# EAGLE board blinkm_battir2 (EAGLE 5.07)
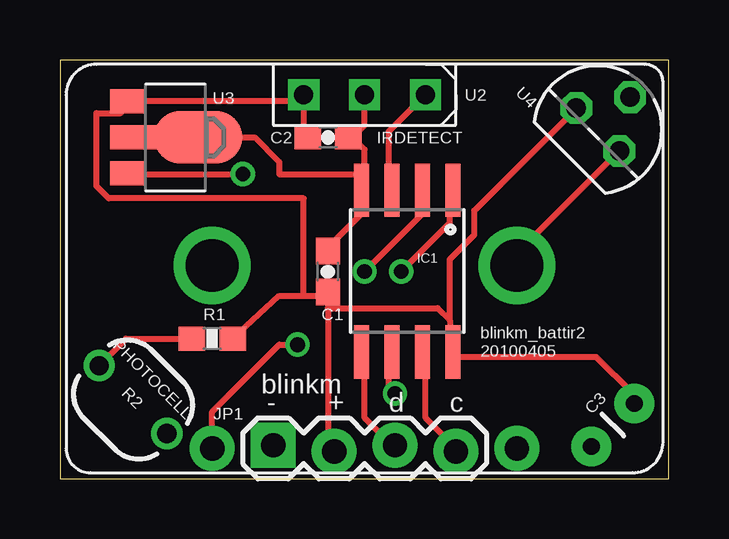
[diagram p0: board, top side]
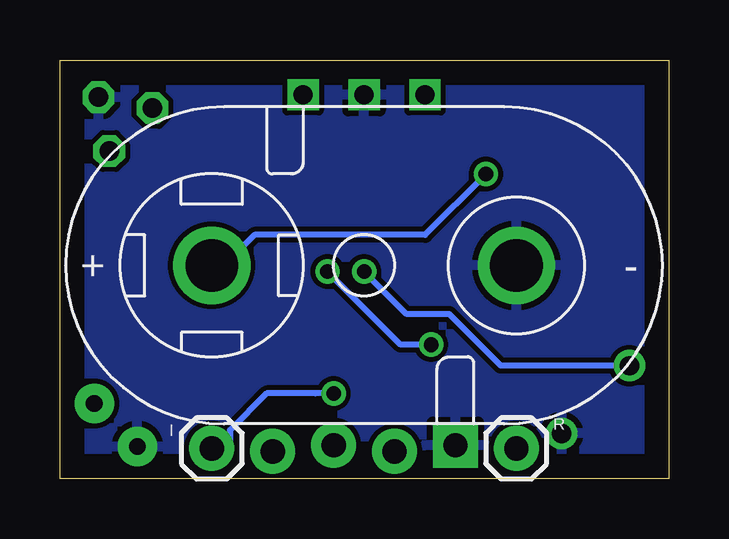
[diagram p1: board, bottom side, seen from below]

Size 25.38 x 17.45 mm. Coordinates in mm from the lower left corner, seen from the top.
Outline: 0,0 25.38,0 25.38,17.45 0,17.45 0,0
Copper layers (1*16): Top 0.035mm / dielectric 1.5mm / Bottom 0.035mm
Design rules "default *": minimum track width 10mil, minimum drill 24mil, track to track 8mil, track to pad 8mil, pad to pad 8mil, via to via 8mil, smd to smd 8mil, copper to edge 40mil, drill to drill 8mil, minimum pad ring 10mil, minimum via ring 8mil, stop-mask expansion 4mil, vias tented up to drill 25mil, thermal gap 10mil

## Footprints (pad centres in the part's own frame; a part is rotated, then mirrored left to right if it is on the bottom)
KEYSTONE_968_9V_VERT = drill 2.2 round: + 6.35,0; - -6.35,0
0603-CAP = smd 1.1 x 1: 1 -0.85,0; 2 0.85,0
CAP-PTH-SMALL = drill 0.7 pad 1.651 round: 1 0,0; 2 2.54,0
1X01 = drill 1.016 pad 1.88 round: 1 0,0
SO08-EIAJ = smd 0.61 x 2.21: 1 -1.905,-3.378; 2 -0.635,-3.378; 3 0.635,-3.378; 4 1.905,-3.378; 5 1.905,3.353; 6 0.635,3.353; 7 -0.635,3.353; 8 -1.905,3.353
1X04_LOCK = drill 1.016 pad 1.88 square: 1 0,0.127 | drill 1.016 pad 1.88 round: 2 2.54,-0.127; 3 5.08,0.127; 4 7.62,-0.127
0603-RES = smd 1.1 x 1: 1 -0.85,0; 2 0.85,0
PHOTOCELL = drill 0.8 round: 1 -2,0; 2 2,0
3PIN-2.54MM = drill 0.8 square: 1 -2.54,0; 2 0,0; 3 2.54,0
SOT89 = smd 1 x 1.5: 1 -1.499,-1.981; 3 1.499,-1.981 | smd 1 x 2: 2 0,-1.727 | smd 2.2 x 3.7: 2@1 0,0.94
TO92 = drill 0.813 octagon: 1 -1.27,0; 2 0,1.905; 3 1.27,0

## Placement (x,y rotation side)
B1  BATTERY_9V  [KEYSTONE_968_9V_VERT]  12.7,8.89 180 bottom
C1  100n  [0603-CAP]  11.18,8.64 90 top
C2  100n  [0603-CAP]  11.18,14.22 0 top
C3  [CAP-PTH-SMALL]  23.95,3.14 225 top
I  M01PTH  [1X01]  19.05,1.27 0 bottom
IC1  ATTINY45SOIC  [SO08-EIAJ]  14.48,8.64 180 top
JP1  blinkm  [1X04_LOCK]  8.89,1.27 0 top
R  M01PTH  [1X01]  6.35,1.27 0 bottom
R1  [0603-RES]  6.35,5.84 0 top
R2  PHOTOCELLPTH  [PHOTOCELL]  3.05,3.3 135 top
U2  IRDETECTOR  [3PIN-2.54MM]  12.7,16 180 top
U3  78L05F  [SOT89]  4.83,14.22 270 top
U4  7805L  [TO92]  22.43,14.55 315 top

## Library data of the parts
B1 IC1 U2 = todstuff
C1-C3 I JP1 R R1 R2 = SparkFun-20091103
U3 U4 = linear

## Nets
9V: B1.+ U3.3 U4.3
GND: B1.- C1.2 C2.2 C3.2 IC1.4 JP1.1 R2.1 U2.2 U3.2 U3.2@1 U4.2
IRDETECT: IC1.3 U2.1
MISO: I.1 IC1.6
PB3: IC1.2 R1.1 R2.2
RESET: IC1.1 R.1
SCL: IC1.7 JP1.4
SDA: IC1.5 JP1.3
VCC: C1.1 C2.1 C3.1 IC1.8 JP1.2 R1.2 U2.3 U3.1 U4.1

## Tracks (layer width: path | path; a pad name or v marks a point on that pad's centre or on a via)
9V  (via drill 0.61)
  Top 0.254: v7.62,12.7 3.05,12.7 U3.3 | U4.3 22.86,13.21 19.3,9.65 19.3,9.14 B1.+
  Bottom 0.254: v7.62,12.7 10.16,10.16 17.27,10.16 18.29,9.14 18.8,9.14 B1.+
GND
  Top 0.254: 12.19,14.22 12.7,14.73 12.7,15.75 U2.2 | 12.19,14.22 C2.2 12.19,14.22 | C1.2 11.18,9.65 12.7,11.18 12.7,11.68 IC1.4 | 12.19,14.22 12.7,13.72 12.7,12.7 | 12.7,12.7 12.7,12.19 IC1.4 | U3.2 3.56,14.22 5.59,14.22 U3.2@1 6.1,14.22 8.13,14.22 9.14,13.21 9.14,12.7 12.7,12.7 | 12.7,12.7 IC1.4
  pour Bottom: 0,17.78 27.94,17.78 27.94,-1.27 0,-1.27
IRDETECT
  Top 0.254: 13.72,12.19 13.97,11.94 | IC1.3 13.72,12.19 | 13.72,12.19 13.72,14.48 U2.1
MISO  (via drill 0.61)
  Top 0.254: IC1.6 13.72,5.08 13.72,3.81 v13.97,3.56
  Bottom 0.254: v13.97,3.56 14.73,3.56 16.76,3.56 18.29,2.03 18.29,1.52 18.8,1.52 I.1
PB3  (via drill 0.61)
  Top 0.254: 1.52,4.57 R2.2 2.76,5.84 R1.1 | v12.7,8.64 15.24,11.18 15.24,11.68 15.11,11.81 IC1.2
  Bottom 0.254: 1.52,4.57 R2.2 7,4.72 9.14,6.86 10.92,6.86 v12.7,8.64
RESET  (via drill 0.61)
  Top 0.254: 16.26,11.43 16.26,10.67 v14.22,8.64 | 16.26,11.43 16.26,11.68 | IC1.1 16.38,11.56 16.26,11.43 | R.1 6.35,2.79 9.14,5.59 v9.91,5.59
  Bottom 0.254: v14.22,8.64 11.18,5.59 v9.91,5.59
SCL
  Top 0.254: IC1.7 15.24,5.08 15.24,2.54 16.26,1.52 JP1.4
SDA
  Top 0.254: IC1.5 12.7,5.08 12.7,2.54 13.72,1.52 JP1.3
VCC
  Top 0.254: IC1.8 16.26,5.08 22.35,5.08 23.88,3.56 C3.1 | 16.26,6.1 16.26,5.59 | 16.26,6.6 16.26,6.1 | 16.26,6.6 16.26,9.14 17.27,10.16 17.27,11.18 21.34,15.24 U4.1 | 16.26,5.59 IC1.8 | 10.16,15.75 10.16,14.22 C2.1 | 10.16,15.75 U2.3 10.16,15.75 | 10.16,15.75 3.05,15.75 U3.1 2.54,15.24 1.52,15.24 1.52,12.19 2.03,11.68 10.16,11.68 10.16,7.62 | 10.16,7.62 11.18,7.62 | 10.16,7.62 9.14,7.62 R1.2 | 11.18,7.62 C1.1 11.18,7.62 | 11.18,7.11 11.18,1.52 JP1.2 | 11.18,7.62 11.18,7.11 | 16.26,6.1 16.26,5.59 | 16.26,6.6 16.26,6.1 | 16.26,6.6 15.75,7.11 11.18,7.11 | 16.26,5.59 IC1.8

## Text on the board
tPlace: IRDETECT | blinkm_battir2 | 20100405 | blinkm | PHOTOCELL | - | + | d | c